# Altium PCB JlinkV9_RST.PcbDoc
Units mm, origin at the board's own origin, x right, y up, seen from the top; angles counter-clockwise.
Board outline 35.79 x 17.25 mm, 2 copper layers (Top Layer, Bottom Layer); 43 components, 41 nets, 196 pads, 71 vias.
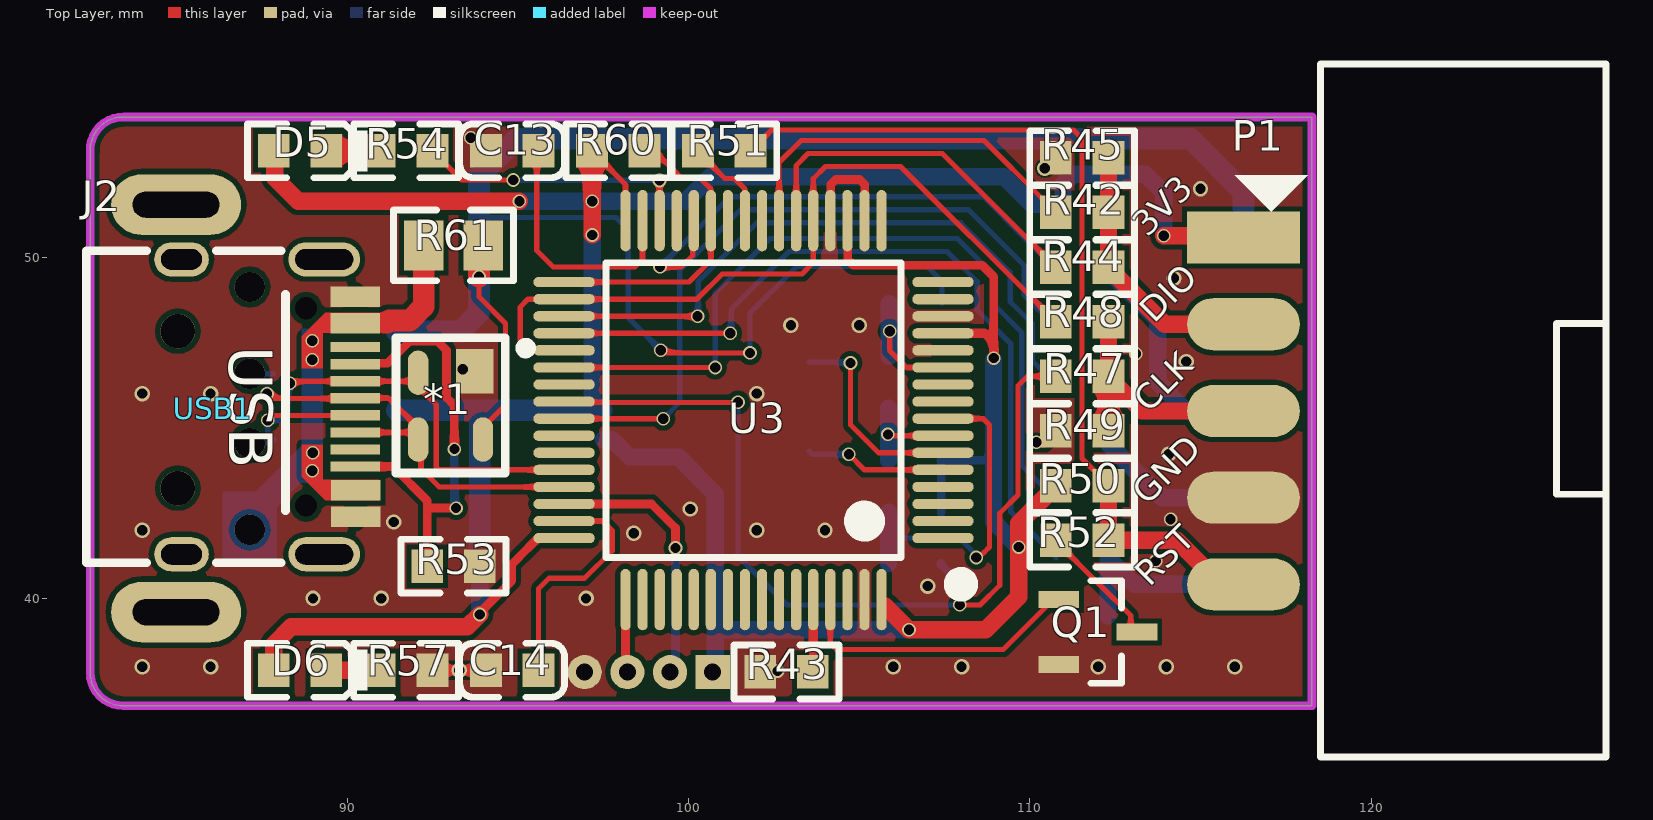
[diagram p0: Top Layer view]
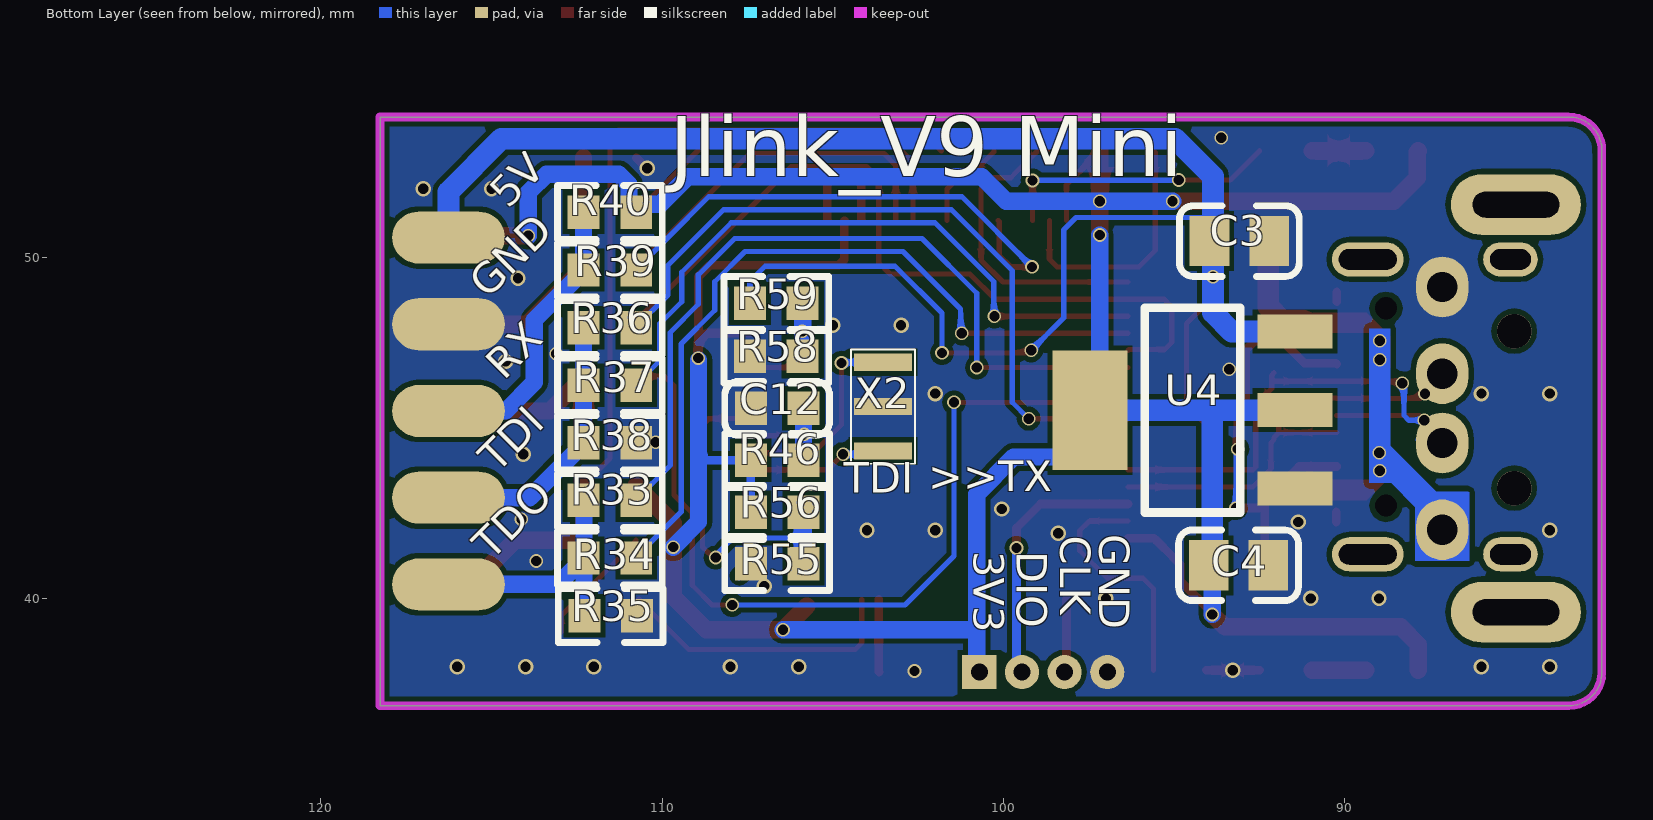
[diagram p1: Bottom Layer view, seen from below]

## Layer stack, top to bottom
Top Solder: solder mask 0.0102, Solder Resist, Dk 3.5
Top Layer: signal copper 0.0356
Dielectric 1: dielectric 0.32, FR-4, Dk 4.8
Bottom Layer: signal copper 0.0356
Bottom Solder: solder mask 0.0102, Solder Resist, Dk 3.5

## Board outline
82.473,37.822 ccw(c83.439,37.822) 83.439,36.855 118.262,36.855 118.262,54.102 83.464,54.102 ccw(c83.438,53.137) 82.474,53.086

## Design rules (kind name [scope] priority, off if disabled: settings)
Clearance [All] p1: gap=0.152 ignorepadtopadclearanceinfootprint=FALSE
PolygonConnect [All] p1: connectstyle=Direct reliefconductorwidth=0.254 reliefentries=4 polygonreliefangle="90 Angle" airgapwidth=0.254
RoutingVias [All] p1: holewidth=0.3 width=0.4 viastyle="Through Hole" minholewidth=0.3 minwidth=0.4 maxholewidth=0.3 maxwidth=0.4
SolderMaskExpansion [All] p1: expansion=0.102 istentingtop=FALSE
Width [All] p1: maxlimit=0.762 minlimit=0.152 preferedwidth=0.254
30 further rules are at their usual default settings.

## Components (designator, comment, footprint, x,y, rotation, side; value= is the part's Value field where it differs from the comment)
*1 "PRTR5V0U2X" LC-SOT-143 93.03,45.653 r90 top
C3 "104" LC-0805_C 93.091,50.47 r0 bottom
C4 "104" LC-0805_C 93.116,40.97 r0 bottom
C12 "104" LC-0603_C 106.629,45.568 r0 bottom
C13 "2.2UF" LC-0603_C 94.835,53.111 r0 top value=2.2uf
C14 "2.2UF" LC-0603_C 94.835,37.897 r0 top value=2.2uf
D5 "白灯 0603" 0603_LED_S1 88.621,53.111 r180 top
D6 "白灯 0603" 0603_LED_S1 88.621,37.897 r180 top
J2 "USB type C" "USB Type-C-16Pin_A" 85.149,45.613 r270 top
P1 "Header 5X2" "300S-2*5P 2.54MM_2" 116.256,50.571 r0 top
Q1 "SS8050" SOT23-3N 111.989,39.014 r270 top
R33 "100R" LC-0603_R 111.531,42.872 r0 bottom value=101
R34 "100R" LC-0603_R 111.531,41.184 r0 bottom value=101
R35 "10K" LC-0603_R 111.506,39.497 r0 bottom value=220K
R36 "100R" LC-0603_R 111.531,47.933 r0 bottom value=101
R37 "100R" LC-0603_R 111.531,46.246 r0 bottom value=101
R38 "10K" LC-0603_R 111.531,44.559 r0 bottom
R39 "100R" LC-0603_R 111.531,49.621 r0 bottom value=101
R40 "10K" LC-0603_R 111.531,51.308 r0 bottom
R42 "100R" LC-0603_R 111.531,51.308 r0 top value=101
R43 "10K" LC-0603_R 102.87,37.846 r0 top value=10K.
R44 "100R" LC-0603_R 111.531,49.708 r0 top value=101
R45 "10K" LC-0603_R 111.531,52.908 r0 top
R46 "10K" LC-0603_R 106.629,44.044 r180 bottom
R47 "100R" LC-0603_R 111.531,46.507 r0 top value=101
R48 "100R" LC-0603_R 111.531,48.108 r0 top value=101
R49 "10K" LC-0603_R 111.531,44.907 r0 top
R50 "100R" LC-0603_R 111.531,43.307 r0 top value=10K
R51 "100R" LC-0603_R 101.049,53.111 r0 top value=101
R52 "100R" LC-0603_R 111.531,41.707 r0 top value=101
R53 "1K" LC-0603_R 93.116,40.945 r180 top value=1.5K
R54 "1K" LC-0603_R 91.728,53.111 r180 top value=102
R55 "10K" LC-0603_R 106.629,41.021 r180 bottom
R56 "10K" LC-0603_R 106.629,42.52 r0 bottom
R57 "1K" LC-0603_R 91.728,37.897 r180 top value=102
R58 "10K" LC-0603_R 106.655,47.092 r180 bottom
R59 "1K" LC-0603_R 106.655,48.641 r0 bottom value=10K
R60 "1K" LC-0603_R 97.942,53.111 r180 top value=10K
R61 "1A保险丝" LC-0805_R 93.116,50.343 r180 top value=10K
U3 "STM32F205RET6" "LQFP64 10x10_N" 101.905,45.517 r90 top
U4 "AMS1117_1" LC-SOT-223 94.463,45.517 r180 bottom
USB1 "USB" USB公头 84.988,51.537 r180 top locked
X2 "12MHz" 3脚晶振 103.53,45.618 r270 bottom

## Footprints (in the part's own frame and the unit in brackets; to place one, negate y for a bottom-side part, rotate by r counter-clockwise, add the part's x,y. Pads: shape width x height; smd on the part's side, far side on the other; paste and mask are expansions set on the pad)
3脚晶振 [mm]
  rect 0.5x1.7 smd: 1(1.3,0) 2(-1.3,0) 3(0,0)
  silkscreen extent -1.68,-0.94 1.68,0.94
"300S-2*5P 2.54MM_2" [mil] "2.54mm 2*5P 直 简牛"
  rect 130x60 smd: 1(0,0)
  oval 130x60 smd far side: 2(0,0) 4(0,-100) 6(0,-200) 8(0,-300) 10(0,-400)
  oval 130x60 smd: 3(0,-100) 5(0,-200) 7(0,-300) 9(0,-400)
  silkscreen extent -10,-599 418,200, body extent -50,-604 426,204, height 169
0603_LED_S1 [mm]
  rect 0.93x0.98 smd: A(0.77,0) K(-0.77,0)
  silkscreen extent -1.98,-0.79 1.54,0.79, body extent -0.8,-0.4 0.8,0.4, height 0.6
LC-0603_C [mm]
  rect 0.93x0.98 smd: 1(-0.77,0) 2(0.77,0)
  silkscreen extent -1.54,-0.79 1.54,0.79, body extent -0.8,-0.4 0.8,0.4, height 0.3
LC-0603_R [mm]
  rect 0.93x0.98 smd: 1(-0.77,0) 2(0.77,0)
  silkscreen extent -1.53,-0.79 1.54,0.79, body extent -0.85,-0.4 0.85,0.4, height 0.56
LC-0805_C [mm]
  rect 1.16x1.47 smd: 1(-0.875,0) 2(0.875,0)
  silkscreen extent -1.76,-1.04 1.76,1.04, body extent -1,-0.63 1,0.63, height 0.77
LC-0805_R [mm]
  rect 1.16x1.47 smd: 1(-0.875,0) 2(0.875,0)
  silkscreen extent -1.75,-1.03 1.75,1.03, body extent -1,-0.62 1,0.63, height 0.49
LC-SOT-143 [mm]
  rect 1.3x1.1 smd: 1(1,-0.71)
  oval 1.3x0.6 smd: 2(0.96,0.95) 3(-1,0.95) 4(-1,-0.95)
  silkscreen extent -1.98,-2.35 1.98,1.6, body extent -1.23,-1.46 1.19,1.46, height 1
LC-SOT-223 [mm]
  rect 2.2x1 smd: 1(3,-2.3) 2(3,0) 3(3,2.3)
  rect 2.2x3.5 smd: 2(-3,0)
  silkscreen extent -1.4,-3 1.4,3, body extent -3.49,-3.24 3.49,3.24, height 1.64
"LQFP64 10x10_N" [mm] "64脚，体宽10x10mm，脚距0.5mm"
  oval 0.3x1.8 smd: 1(-3.75,-5.55) 2(-3.25,-5.55) 3(-2.75,-5.55) 4(-2.25,-5.55) 5(-1.75,-5.55) 6(-1.25,-5.55) 7(-0.75,-5.55) 8(-0.25,-5.55) 9(0.25,-5.55) 10(0.75,-5.55) 11(1.25,-5.55) 12(1.75,-5.55) 13(2.25,-5.55) 14(2.75,-5.55) 15(3.25,-5.55) 16(3.75,-5.55) 33(3.75,5.55) 34(3.25,5.55) 35(2.75,5.55) 36(2.25,5.55) 37(1.75,5.55) 38(1.25,5.55) 39(0.75,5.55) 40(0.25,5.55) 41(-0.25,5.55) 42(-0.75,5.55) 43(-1.25,5.55) 44(-1.75,5.55) 45(-2.25,5.55) 46(-2.75,5.55) 47(-3.25,5.55) 48(-3.75,5.55)
  oval 1.8x0.3 smd: 17(5.55,-3.75) 18(5.55,-3.25) 19(5.55,-2.75) 20(5.55,-2.25) 21(5.55,-1.75) 22(5.55,-1.25) 23(5.55,-0.75) 24(5.55,-0.25) 25(5.55,0.25) 26(5.55,0.75) 27(5.55,1.25) 28(5.55,1.75) 29(5.55,2.25) 30(5.55,2.75) 31(5.55,3.25) 32(5.55,3.75) 49(-5.55,3.75) 50(-5.55,3.25) 51(-5.55,2.75) 52(-5.55,2.25) 53(-5.55,1.75) 54(-5.55,1.25) 55(-5.55,0.75) 56(-5.55,0.25) 57(-5.55,-0.25) 58(-5.55,-0.75) 59(-5.55,-1.25) 60(-5.55,-1.75) 61(-5.55,-2.25) 62(-5.55,-2.75) 63(-5.55,-3.25) 64(-5.55,-3.75)
  silkscreen extent -5.35,-6.33 4.32,4.32, body extent -6,-6 6,6, height 1.45
SOT23-3N [mm] "3x1.3x1mm(长宽高)"
  rect 0.5x1.2 smd: 1(-0.95,-1.143) 2(0.95,-1.143) 3(0,1.143)
  silkscreen extent -1.5,-0.2 1.5,0.7, body extent -1.5,-1.2 1.5,1.2, height 1.05
"USB Type-C-16Pin_A" [mm]
  round 0 hole 0.65: 0(-2.89,3.65) 0(2.89,3.65)
  oval 1x2.1 hole 0.6 slot 1.7 at 90 deg: 1(-4.32,4.18) 1(4.32,4.18)
  oval 1x1.6 hole 0.6 slot 1.2 at 90 deg: 1(-4.32,0) 1(4.32,0)
  rect 0.3x1.45 smd: A1(-3.375,5.092) A4(-2.6,5.092) A5(-1.25,5.092) A6(-0.25,5.092) A7(0.25,5.092) A8(-1.75,5.092) A9(2.6,5.1) A12(3.375,5.1) B1(3.075,5.1) B4(2.3,5.1) B5(1.75,5.092) B6(0.75,5.092) B7(-0.75,5.092) B8(1.25,5.092) B9(-2.3,5.092) B12(-3.075,5.092)
  silkscreen extent -4.57,-2.79 4.57,3.05, body extent -4.47,-2.6 4.47,5.3, height 3.25
USB公头 [mil]
  oval 150x70 hole 30 slot 100 at 0 deg: 0(0,470) 0(0,0)
  round 35 hole 35 unplated: 1(-85,375) 2(-85,275) 3(-85,195) 4(-85,95)
  body extent -94,-10 694,482, height 178

## Part data
C3 C4 C12 C13 C14: library part Cap, "Polarized Capacitor (Radial)", Published=8-Jun-2000, Publisher="Altium Limited", Revision="July-2002: Re-released for DXP Platform."
D5 D6: library part "0603 白灯", "发光二极管", Package=0603, SuppliersPartNumber=C2290, ComponentLink1Description=供应商链接, ComponentLink1URL=http://www.szlcsc.com/product/details_2663.html, Supplier=LC
J2: library part USB_C
P1: "Header, 5-Pin, Dual row", LatestRevisionDate=17-Jul-2002, LatestRevisionNote="Re-released for DXP Platform.", Publisher="Altium Limited"
Q1: library part 8050-SMD, "高频放大-NPN型", BOM名称=高频放大-NPN型, 学习资源=www.ooocke.com, 属性="40V 1.5A 1W 100MHZ", 版权归属=源创客
R33 R34 R35 R36 R37 R38 R39 R40 R42 R43 R44 R45 R46 R47 R48 R49 R50 R51 R52 R54 R55 R56 R57 R58 R59 R60: library part Resistor, "Resistor Chip", Published=8-Jun-2000, Publisher="Altium Limited", Revision="July-2002: Re-released for DXP Platform."
R53 R61: library part Res2, "Resistor", LatestRevisionDate=17-Jul-2002, LatestRevisionNote="Re-released for DXP Platform.", PackageReference=AXIAL-0.4, Published=8-Jun-2000, Publisher="Altium Limited"
U3: "Microcontroller   ST", Brand=ST, Code=104261, InitialReleaseDate=25-Mar-2015, LatestRevisionDate=25-Mar-2015, PackageReference=SQFP10x10-64, Vision=V5.0
U4: "3.3V电压转换器AMS1117"
USB1: library part USB公头
X2: library part XTAL-3P, "3脚无源晶振", BOM名称=2脚晶振, 学习资源=www.ooocke.com, 版权归属=源创客

## Free pads (board coordinates)
  round 1.016 hole 1.016 unplated: 1(85.039,43.231) 1(85.039,47.828)
  rect 1x1 hole 0.5: 1(100.709,37.842)
  round 1 hole 0.5: 2(99.459,37.842) 3(98.209,37.842) 4(96.959,37.842)
  oval 1.524x1.778 smd far side: 8(87.147,42.012) 8(87.147,44.552) 8(87.147,46.584) 8(87.147,49.124)

## Via types
v1: diameter 0.4, hole 0.3, Top Layer to Bottom Layer, tented both sides, 42 vias
v2: diameter 0.45, hole 0.3, Top Layer to Bottom Layer, tented both sides, 29 vias

## Nets (pads, with @x,y where several pads share a name; then routed paths per layer and width w, separated by ;. In a path a pad name is that pad's centre, name@x,y a point inside that pad or via, vN(x,y) a via of type N, cw(c..) or ccw(c..) an arc to the next point about the centre after c; other vN are vias at no path point)
3V3: C4.2 D5.A D6.A P1.1 pad.1@100.709,37.842 R40.1 R46.1 R50.1 R56.2 R60.2 U3.13 U3.19 U3.32 U3.48 U3.64 U4.2 | length 107.5
  Top Layer w0.152: R60.2@97.51,52.773 97.51,52.748 97.561,52.698 97.586,52.698 98.155,52.129 U3.32
  Top Layer w0.254: v1(93.886,39.53) 93.886,39.581 94.819,40.513 94.819,40.996 95.301,41.479 95.305,41.479 95.592,41.767 U3.48 ; R60.2 R60.2@97.51,52.773 ; U3.19 104.664,51.058 104.664,49.921 104.826,49.759 108.608,49.759 108.941,49.426 108.941,47.523 ; U3.13 108.697,47.767 108.941,47.523 ; v1(108.941,47.041) 108.941,47.523
  Top Layer w0.508: D6.A 87.851,38.651 88.367,39.167 93.523,39.167 v1(93.886,39.53) ; D5.A 87.884,53.078 87.884,52.324 88.57,51.638 v1(95.047,51.638) ; v1@97.172,51.638 R60.2 ; v1(97.177,51.638) 97.18,51.635 v1(97.18,50.648) ; U3.64@105.759,39.776 106.454,39.082 v1(106.461,39.082) 108.711,39.082 109.677,40.048 v1(109.677,41.504) 109.677,42.198 110.761,43.282 R50.1 ; v1(113.919,50.622) 116.205,50.622 P1.1
  Bottom Layer w0.254: R56.2 R46.1 108.783,44.044 108.91,44.171
  Bottom Layer w0.508: v1(93.886,39.53) 93.886,40.865 C4.2 ; C4.2@93.886,40.97 93.939,40.918 C4.2@93.955,40.902 ; v1(95.047,51.638) v1(97.177,51.638) 99.924,51.638 100.635,52.349 109.245,52.349 110.051,51.544 110.55,51.544 110.761,51.333 R40.1 ; v1(97.18,50.648) 97.18,45.799 U4.2@97.463,45.517 ; U4.2@97.511,44.653 97.765,44.653 98.273,44.145 99.695,44.145 100.784,43.056 100.784,39.082 ; pad.1@100.709,37.842 100.784,37.917 100.784,39.082 ; v1(106.461,39.082) 100.784,39.082 ; 108.91,44.171 108.935,44.145 ; v1@108.935,46.984 108.935,44.145 ; v1(109.677,41.504) 108.935,42.246 108.935,44.145 ; R40.1@110.575,51.519 110.761,51.519 110.972,51.519 110.972,52.128 111.27,52.426 113.386,52.426 113.919,51.892 v1(113.919,50.622)
  Bottom Layer w0.635: U4.2@91.463,45.517 93.98,45.517 ; C4.2@93.886,40.97 93.886,45.423 93.98,45.517 ; U4.2@97.463,45.517 93.98,45.517
5V: *1.4 C3.2 P1.2 R59.2 R61.1 U4.3 | length 57.2
  Top Layer w0.152: v1(93.861,49.42) 93.861,48.836 94.64,48.057 94.64,45.664 93.98,45.003 *1.4 ; v1(99.187,47.269) 99.263,47.193 v1(101.803,47.193)
  Top Layer w0.635: v1(93.861,49.42) 93.861,50.212 R61.1
  Bottom Layer w0.152: C3.2@93.861,51.156 97.877,51.156 98.238,50.794 98.238,48.218 v1(99.187,47.269) ; R59.2 107.425,49.293 106.985,49.733 103.175,49.733 101.803,48.362 v1@101.803,47.288 ; v1@101.803,47.288 101.851,47.241 v1(101.803,47.193) v1@101.803,47.288
  Bottom Layer w0.635: U4.3 93.308,47.817 93.861,48.37 v1(93.861,49.42) 93.861,50.47 93.861,51.156 93.861,52.357 94.971,53.467 114.706,53.467 116.256,51.918 P1.2
5V_IN: J2.A4 J2.A9 J2.B4 J2.B9 pad.8@87.147,42.012 R61.2 | length 3.1
  Top Layer w0.635: 91.083,48.082 91.175,48.082 91.232,48.14 91.828,48.14 92.241,48.553 R61.2
  other v1: 88.976,43.739 88.993,44.269 88.976,46.99 88.976,47.549
CC: J2.A5 J2.B5 R53.2 | length 13.1
  Top Layer w0.254: J2.B5 91.341,43.863 92.346,42.858 92.346,42.57 ; J2.A5 90.263,46.886 91.183,46.886 91.501,47.203 91.84,47.543 92.64,47.543 92.911,47.272 92.911,45.887 93.142,45.656 v1(93.142,44.374) ; R53.2 92.346,42.57 ; v1(93.193,42.647) 92.423,42.647 92.346,42.57
  Bottom Layer w0.254: v1(93.142,44.374) 93.142,42.697 v1(93.193,42.647)
CLK: pad.3 U3.49 | length 2.1
  Top Layer w0.254: pad.3@98.155,37.842 U3.49
DIO: pad.2 U3.46 | length 7.8
  Top Layer w0.254: U3.46 98.914,42.767 99.619,42.062 v1(99.619,41.478)
  Bottom Layer w0.254: pad.2@99.619,37.842 v1(99.619,41.478)
GND: *1.1 C3.1 C4.1 C12.2 C13.1 C14.1 J2.A1 J2.A12 J2.B1 J2.B12 P1.4 P1.7 pad.4 pad.8@87.147,49.124 Q1.2 R35.1 R38.1 R43.1 R45.1 R49.1 R53.1 R55.1 R57.1 R58.1 U3.12 U3.14 U3.18 U3.20 U3.63 U4.1 X2.3 | length 7.1
  Top Layer w0.254: J2.B12 J2.A1 ; J2.A12 J2.B1 ; R57.1 C14.1 ; U3.20 104.164,51.076 104.164,52.124 104.312,52.273 105.015,52.273 105.164,52.124 105.164,51.076 U3.18 ; U3.12@107.446,47.276 U3.12 ; v1(110.192,44.577) 110.217,44.552 110.423,44.552 110.761,44.89 R49.1 ; v2(110.439,52.603) 110.457,52.603 R45.1
  Bottom Layer w0.254: R55.1 107.399,40.996 R55.1@107.737,40.658
  other v1: 102.605,37.875 113.69,41.097 114.122,42.316 93.39,46.711 113.106,47.168 93.624,53.492
  other v2: 93.281,37.897 84,38 86,38 106,38 108,38 112,38 114,38 116,38 89,40 91,40 97,40 107.01,40.361 98.4,41.91 84,42 102,42 104,42 91.364,42.24 100.051,42.621 114.071,44.221 84,46 86,46 102,46 114.579,46.939 103,48 105,48 114.224,49.378 115,52 117,52
LED: R54.1 U3.30 | length 8.2
  Top Layer w0.152: R54.1 93.353,52.256 v1(94.866,52.256) ; v1(99.15,52.245) 99.153,52.242 99.153,51.069 U3.30
  Bottom Layer w0.152: v1(94.866,52.256) 94.872,52.25 99.145,52.25 v1(99.15,52.245)
NetC12_1: C12.1 R46.2 U3.7 | length 3.2
  Top Layer w0.152: v1(105.842,44.806) 105.881,44.767 U3.7
  Bottom Layer w0.508: R46.2 C12.1
NetC13_2: C13.2 U3.31 | length 7.5
  Top Layer w0.152: C13.2 95.555,53.061 95.555,50.19 96.037,49.708 98.425,49.708 98.655,49.938 U3.31
NetC14_2: C14.2 U3.47 | length 7.1
  Top Layer w0.152: C14.2 95.605,40.284 95.91,40.589 96.956,40.589 97.765,41.398 97.765,41.986 97.484,42.267 U3.47
NetD5_K: D5.K R54.2 | length 1.6
  Top Layer w0.508: D5.K R54.2
NetD6_K: D6.K R57.2 | length 1.6
  Top Layer w0.508: D6.K R57.2
NetQ1_3: Q1.3 R52.1 | length 3.6
  Top Layer w0.152: R52.1 110.761,41.682 112.045,40.398 112.059,40.398 112.954,39.503 Q1.3@112.954,39.025
NetR43_2: R43.2 U3.60 | length 2.1
  Top Layer w0.254: R43.2 103.655,37.861 U3.60
OSC1: U3.5 X2.1 | length 4.2
  Top Layer w0.152: v1(104.699,44.221) 105.153,43.767 U3.5
  Bottom Layer w0.152: X2.1 103.627,44.221 v1(104.699,44.221)
OSC2: U3.6 X2.2 | length 6.1
  Top Layer w0.152: v1(104.745,46.898) 104.745,45.089 105.568,44.267 U3.6
  Bottom Layer w0.152: X2.2 104.725,46.918 v1(104.745,46.898)
PA5: R48.1 U3.21 U3.34 U3.37 | length 23.2
  Top Layer w0.152: U3.37 96.327,47.295 95.275,47.295 95.072,47.498 95.072,48.539 95.3,48.767 U3.34 100.253,48.767 100.99,49.505 103.327,49.505 103.655,49.832 U3.21 103.655,52.296 104.013,52.654 106.215,52.654 110.348,48.521 110.373,48.521 110.761,48.133 R48.1
PA6: R44.1 U3.22 | length 10.8
  Top Layer w0.152: U3.22 103.155,52.685 103.505,53.035 107.434,53.035 110.348,50.122 110.373,50.122 110.761,49.733 R44.1
PA7: R42.1 U3.23 | length 11
  Top Layer w0.152: U3.23 102.655,52.769 103.302,53.416 108.653,53.416 110.348,51.722 110.373,51.722 110.761,51.333 R42.1
PA8: R36.1 U3.41 | length 21.2
  Top Layer w0.152: U3.41 96.357,45.265 v1(99.261,45.265)
  Bottom Layer w0.152: v1(99.261,45.265) 99.263,45.263 99.746,45.745 99.746,49.606 101.524,51.384 108.204,51.384 109.83,49.759 109.83,48.89 110.761,47.958 R36.1
PA10: U3.43
PB1: R60.1 U3.27 U3.33 | length 9.1
  Top Layer w0.152: U3.33 100.016,49.267 100.655,49.906 U3.27 100.655,51.991 100.323,52.323 99.79,52.323 99.586,52.527 99.001,53.111 R60.1
PB2: R39.1 U3.28 | length 15.5
  Top Layer w0.152: v1(99.164,49.712) 99.784,49.712 100.127,50.054 100.127,51.039 U3.28
  Bottom Layer w0.152: v1(99.164,49.712) 101.217,51.765 108.642,51.765 109.83,50.577 110.761,49.646 R39.1
PB8: Q1.1 U3.61 | length 8.5
  Top Layer w0.152: U3.61 104.155,38.695 104.343,38.506 109.22,38.506 110.688,39.975 Q1.1@110.668,39.975
PB14: R37.1 U3.35 | length 19.3
  Top Layer w0.152: U3.35 96.358,48.263 v1(100.267,48.263)
  Bottom Layer w0.152: v1(100.267,48.263) 100.286,48.244 100.286,49.283 102.006,51.003 107.975,51.003 109.423,49.555 109.423,48.692 110.068,48.047 110.068,46.965 110.761,46.271 R37.1
PB15: R34.1 U3.36 | length 22.9
  Top Layer w0.152: U3.36 v1(101.222,47.767)
  Bottom Layer w0.152: v1(101.222,47.767) 101.256,47.801 101.256,48.475 102.946,50.165 107.569,50.165 108.458,49.276 108.458,48.441 109.442,47.457 109.442,42.528 110.761,41.209 R34.1
PC0: R55.2 R56.1 U3.8 | length 9.9
  Top Layer w0.152: U3.8 108.632,45.267 108.814,45.085 108.814,41.504 108.661,41.351 108.652,41.351 108.5,41.199 v1(108.433,41.199)
  Bottom Layer w0.152: 105.859,41.77 107.928,41.77 108.17,41.529 108.433,41.266 v1(108.433,41.199)
  Bottom Layer w0.508: R55.2 105.859,41.77 R56.1
PC3: R58.2 R59.1 U3.11 | length 3.9
  Top Layer w0.152: v1(105.893,47.828) 105.893,47.259 106.385,46.767 U3.11
  Bottom Layer w0.508: R58.2 R59.1
PC5: R51.1 U3.25 | length 2.8
  Top Layer w0.152: R51.1 100.279,53.086 101.06,52.305 101.348,52.305 101.655,51.998 U3.25
PC7: R33.1 U3.38 | length 23.2
  Top Layer w0.152: U3.38 96.357,46.764 v1(100.781,46.764)
  Bottom Layer w0.152: v1(100.781,46.764) 100.782,48.94 102.387,50.546 107.874,50.546 108.941,49.479 108.941,48.616 109.763,47.793 109.763,43.895 110.761,42.897 R33.1
PC8: U3.39
PC9: R47.1 U3.40 | length 25.4
  Top Layer w0.152: U3.40 96.378,45.743 v1(101.45,45.743) ; v1(107.949,39.811) 108.544,39.811 109.118,40.386 109.118,42.494 109.652,43.028 109.652,46.228 109.931,46.507 R47.1
  Bottom Layer w0.152: v1(101.45,45.743) 101.45,41.248 102.886,39.811 v1(107.949,39.811)
RST: P1.9 R50.2 R51.2 R52.2 | length 26.6
  Top Layer w0.152: R51.2 102.429,53.721 111.277,53.721 111.531,53.467 111.531,44.102 112.301,43.332 R50.2
  Top Layer w0.508: R50.2 R52.2 114.3,41.707 115.595,40.411 P1.9
RXD: P1.6 R39.2 R40.2 | length 8.4
  Bottom Layer w0.508: R40.2 R39.2 112.301,49.596 113.741,48.156 113.741,46.331 114.581,45.491 P1.6
TCK: P1.5 R47.2 R48.2 R49.2 | length 7.6
  Top Layer w0.508: R49.2 R47.2@112.301,46.482 ; R48.2 R47.2 R47.2@112.301,46.482 ; P1.5 113.292,45.491 R47.2@112.301,46.482
TDI-Y: P1.8 R36.2 R37.2 R38.2 | length 8
  Bottom Layer w0.508: R36.2 R37.2 R38.2 112.301,44.534 113.884,42.951 P1.8
TDO: P1.10 R33.2 R34.2 R35.2 | length 10.4
  Bottom Layer w0.508: R35.2 112.289,39.51 R34.2@112.289,41.172 ; R34.2 R34.2@112.289,41.172 ; R33.2 R33.2@112.289,42.859 ; P1.10 113.049,40.411 ; R34.2@112.289,41.172 113.049,40.411 ; R34.2@112.289,41.172 112.289,41.184 R33.2@112.289,42.859 ; R34.2@112.289,41.172 R33.2@112.289,42.859 ; R34.2@112.289,41.172 113.049,40.411
TMS: P1.3 R42.2 R44.2 R45.2 | length 7.9
  Top Layer w0.508: R45.2 R42.2 R44.2 112.301,49.683 113.953,48.031 P1.3
USB_DM: *1.2 J2.A7 J2.B7 pad.8@87.147,44.552 U3.44 | length 16
  Top Layer w0.152: v1(87.674,45.217) 87.82,45.363 J2.A7 ; v1(88.319,46.3) 88.381,46.363 J2.B7 92.052,46.363 *1.2@92.098,46.408 ; *1.2 92.141,46.528 92.141,46.154 92.61,45.685 92.61,43.856 92.699,43.767 U3.44
  Bottom Layer w0.152: pad.8@87.147,44.552 87.753,44.552 pad.8@87.755,44.554 ; pad.8@87.859,44.65 87.674,44.836 v1(87.674,45.217) 88.117,45.217 88.265,45.364 v1@88.265,46.279
USB_DP: *1.3 J2.A6 J2.B6 pad.8@87.147,46.584 U3.45 | length 13
  Top Layer w0.152: v1(87.653,45.994) 87.792,45.855 90.232,45.855 J2.A6 90.25,45.872 91.211,45.872 91.934,45.149 *1.3@91.934,44.863 ; J2.B6 *1.3@91.934,44.863 ; *1.3 92.08,44.717 *1.3@91.934,44.863 ; *1.3@92.09,44.631 92.166,44.556 92.166,43.801 92.7,43.267 U3.45
  Bottom Layer w0.152: pad.8@87.147,46.584 pad.8@87.833,46.584 ; v1(87.653,45.994) pad.8@87.653,46.166
pads on no net: J2.0 J2.1 J2.A8 J2.B8 U3.1 U3.2 U3.3 U3.4 U3.9 U3.10 U3.15 U3.16 U3.17 U3.24 U3.26 U3.29 U3.42 U3.50 U3.51 U3.52 U3.53 U3.54 U3.55 U3.56 U3.57 U3.58 U3.59 U3.62 USB1.0 USB1.1 USB1.2 USB1.3 USB1.4

## Polygon pours and split planes (outlines as drawn)
GND on Top Layer "GND_L01_P000" (solid, remove dead copper, pour order 0): 82.525,54.102 118.262,54.102 118.262,36.855 82.448,36.855 82.448,54.026
GND on Bottom Layer "GND_L02_P001" (solid, remove dead copper, pour order 1): 82.398,54.102 118.262,54.102 118.262,36.855 118.186,36.779 82.448,36.779 82.448,54.153

## Keep-outs
Keep-Out Layer:
  the board outline again, w0.254

## Other copper
Top Layer:
  region net 5V_IN: 90.932,42.875 89.357,42.875 88.671,43.561 88.671,44.501 89.281,44.501 89.281,43.473 90.932,43.473 90.932,43.459 90.957,43.434 90.932,43.459 90.932,43.409
  region net 5V_IN: 90.932,48.362 89.357,48.362 88.671,47.676 88.671,46.736 89.281,46.736 89.281,47.777 90.932,47.763 90.932,47.777 90.957,47.803 90.932,47.777 90.932,47.828
  region: 90.957,47.803
Bottom Layer:
  region: 82.677,45.441
  region net 5V_IN: 86.36,41.097 87.935,41.097 87.935,42.672 88.646,43.383 89.281,43.383 89.281,47.904 88.671,47.904 88.671,44.475 87.325,43.129 86.385,43.129 86.36,43.104

## Silkscreen, mask and mechanical layers (free items; w line width, h text height)
Top Overlay:
  text "3V3" at 113.614,50.368 h1.27 r45
  text "DIO" at 113.817,47.854 h1.27 r45
  text "CLK" at 113.665,45.237 h1.27 r45
  text "GND" at 113.614,42.52 h1.27 r45
  text "RST" at 113.69,40.132 h1.27 r45
Bottom Overlay:
  text "Jlink_V9 Mini" at 109.779,51.791 h3
  text "5V" at 114.3,51.181 h1.52 r315
  text "GND" at 114.91,48.539 h1.52 r315
  text "RX" at 114.427,46.152 h1.52 r315
  text "TDI" at 114.63,43.434 h1.52 r315
  text ">>TX" at 102.21,42.85 h1.52
  text "TDI" at 104.673,42.799 h1.52
  text "GND" at 97.485,41.885 h1.52 r90
  text "CLK" at 98.628,41.834 h1.52 r90
  text "DIO" at 99.898,41.377 h1.52 r90
  text "3V3" at 101.168,41.377 h1.52 r90
  text "TDO" at 114.808,40.869 h1.52 r315

## Text inside footprints (layer, text, board x,y; h text height)
J2: Top Overlay "USB" at 86.546,47.391 h1.27 r270